# Altium PCB pcb.pcbdoc
Units mil, origin at the board's own origin, x right, y up, seen from the top; angles counter-clockwise.
Board outline 3200.6 x 1160 mil, 2 copper layers (Top Layer, Bottom Layer), stack 62.2 mil thick; 10 components, 11 nets, 46 pads, 24 vias.
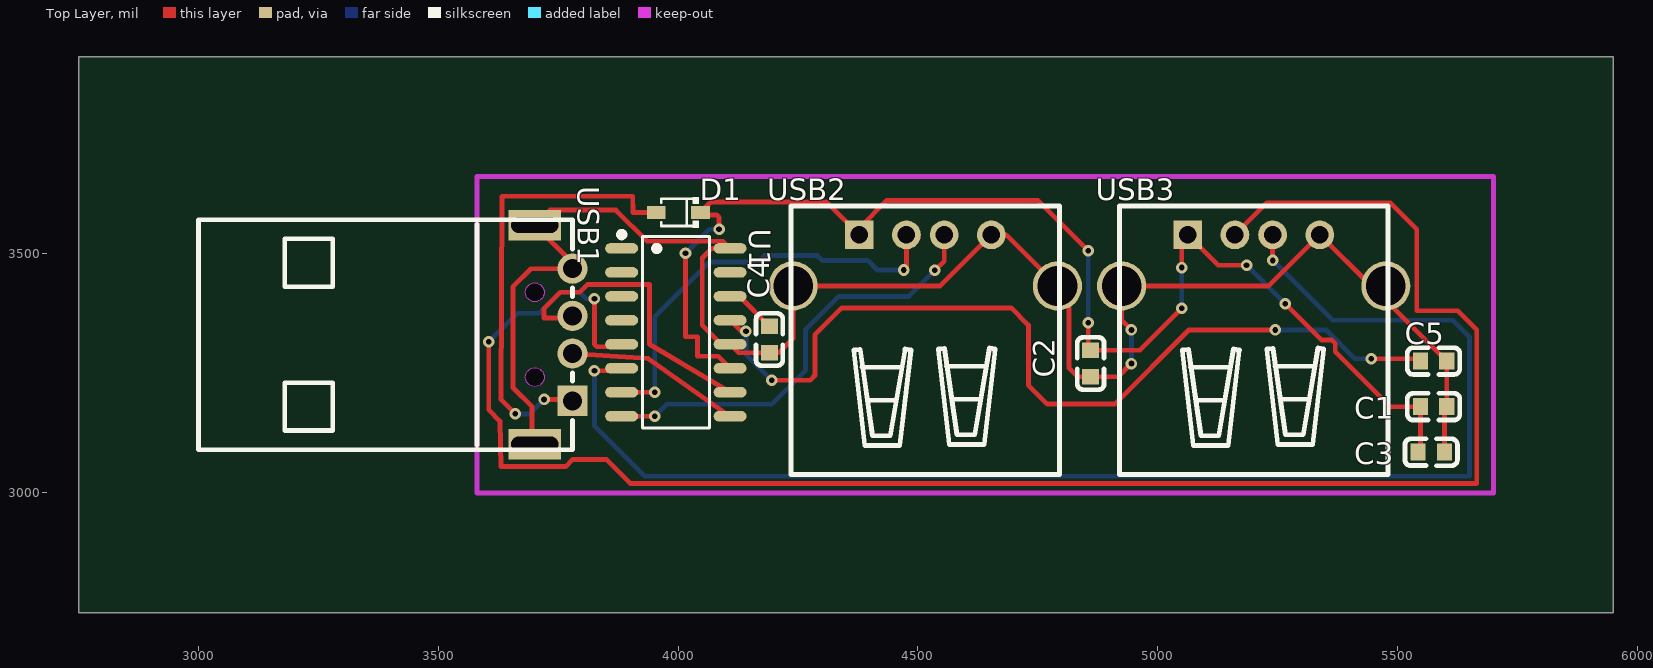
[diagram p0: Top Layer view]
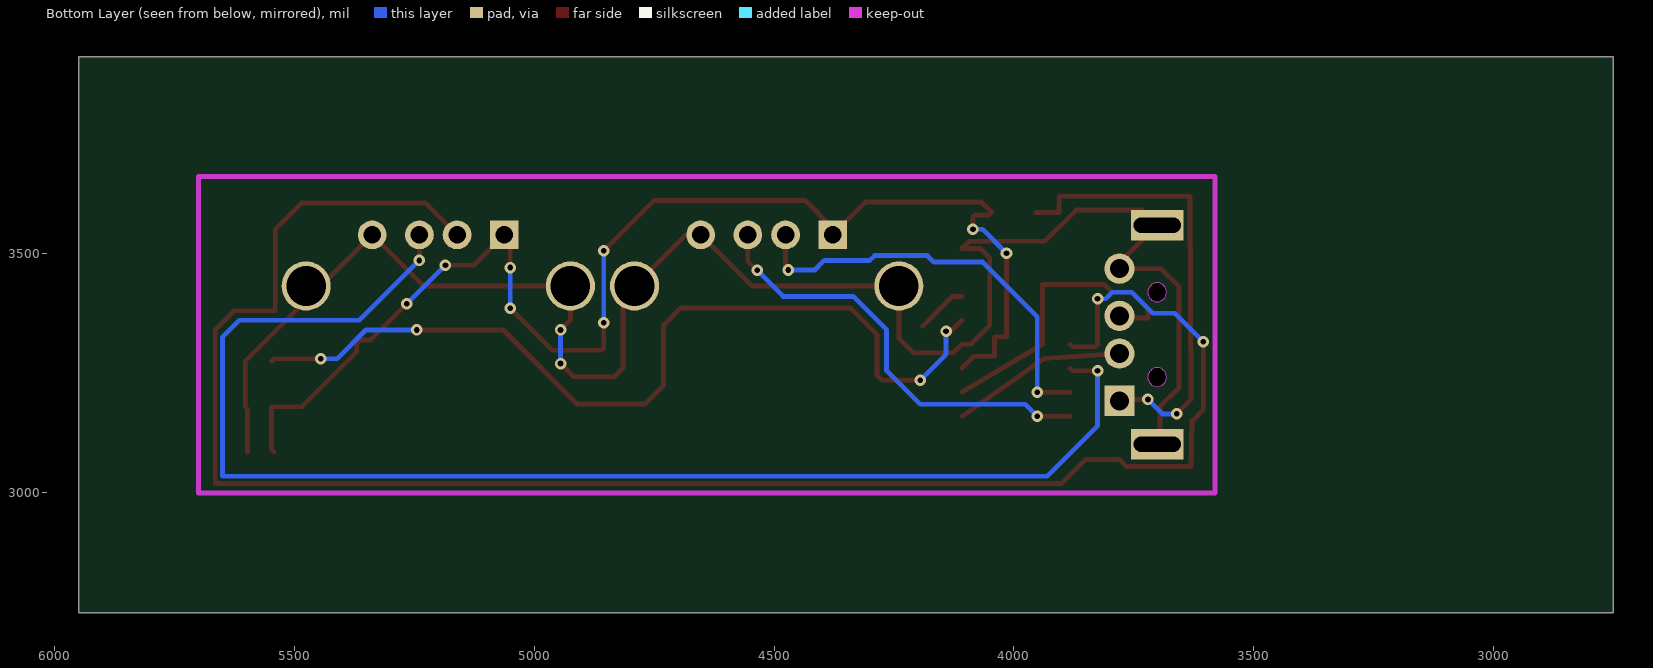
[diagram p1: Bottom Layer view, seen from below]

## Layer stack, top to bottom
Top Solder Mask Layer: solder mask 0.4, Dk 3.3
Top Layer: signal copper 1.4
Dielectric1: surface 59.4, FR4, Dk 4.5
Bottom Layer: signal copper 1.4
Bottom Solder Mask Layer: solder mask 0.4, Dk 3.3

## Board outline
5950.6,2750 2750,2750 2750,3910 5950.6,3910

## Design rules (kind name [scope] priority, off if disabled: settings)
BoardOutlineClearance copperThickness1oz [All] p0: genericclearance=10 ignorepadtopadclearanceinfootprint=FALSE except(0: Arc-SplitContinuation Track-SplitContinuation SMDPad-SplitContinuation THPad-SplitContinuation Via-SplitContinuation Fill-SplitContinuation Poly-SplitContinuation Region-SplitContinuation Text-SplitContinuation)
BoardOutlineClearance copperThickness2oz [All] p0: genericclearance=10 ignorepadtopadclearanceinfootprint=FALSE except(0: Arc-SplitContinuation Track-SplitContinuation SMDPad-SplitContinuation THPad-SplitContinuation Via-SplitContinuation Fill-SplitContinuation Poly-SplitContinuation Region-SplitContinuation Text-SplitContinuation)
BoardOutlineClearance otherClearance [All] p0: genericclearance=10 ignorepadtopadclearanceinfootprint=FALSE except(0: Arc-SplitContinuation Track-SplitContinuation SMDPad-SplitContinuation THPad-SplitContinuation Via-SplitContinuation Fill-SplitContinuation Poly-SplitContinuation Region-SplitContinuation Text-SplitContinuation)
Clearance copperThickness1oz [All] p1: gap=7 ignorepadtopadclearanceinfootprint=FALSE
Clearance copperThickness2oz [All] p1: gap=7 ignorepadtopadclearanceinfootprint=FALSE
Clearance otherClearance [All] p1: gap=7 ignorepadtopadclearanceinfootprint=FALSE
DiffPairsRouting differentialPair [All] p1: maxuncoupledlength=10 minlimit=6 maxlimit=Infinity mostfreqgap=6 toplayer_minwidth=5 toplayer_prefwidth=10 toplayer_maxwidth=100 bottomlayer_minwidth=5 bottomlayer_prefwidth=10 bottomlayer_maxwidth=100
PasteMaskExpansion pasteMaskExpansion [All] p1: expansion=0
PlaneConnect innerPlane [All] p1: planeconnectstyle=Relief reliefexpansion=20 reliefentries=4 reliefconductorwidth=10 reliefairgap=10
PolygonConnect copperRegion [All] p1: connectstyle=Relief reliefentries=4 reliefconductorwidth=10 polygonreliefangle="90 Angle" airgapwidth=10
RoutingVias viaSize [All] p1: viastyle="Through Hole" holewidth=12.0078 minholewidth=11.811 maxholewidth=248.0314 width=12.0078 minwidth=11.811 maxwidth=248.0314
SolderMaskExpansion solderMaskExpansion [IsVia] p1: useseparateexpansions=TRUE expansion=-1000 expansionbottom=-1000
SolderMaskExpansion solderMaskExpansion [All] p2: useseparateexpansions=TRUE expansion=2 expansionbottom=2
Width copperThickness1oz [All] p1: maxlimit=100 minlimit=5 preferedwidth=10
Width copperThickness2oz [All] p1: maxlimit=100 minlimit=8 preferedwidth=10

## Components (designator, comment, footprint, x,y, rotation, side; value= is the part's Value field where it differs from the comment)
C1 "10uF" C0603#1 5575.6,3180 r0 top
C2 "10uF" C0603#2 4860.6,3270 r90 top
C3 "10uF" C0603#3 5570.6,3085 r180 top
C4 "10uF" C0603#2 4190.6,3320 r270 top
C5 "10uF" C0603#1 5575.6,3275 r0 top
D1 "NSR0320MW2T1G" SOD-323_L1.8-W1.3-LS2.5-RD 4000.6,3585 r180 top
U1 "SL2.1A" SOP-16_L10.0-W3.9-P1.27-LS6.0-BL 3995.6,3335 r270 top
USB1 "U-G-O4DD-W-1" USB-A-TH_U-G-04WD-W-01 3740.6,3330 r270 top
USB2 "903-131A1011D10100" USB-A-TH_C46407 4515.6,3485 r0 top
USB3 "903-131A1011D10100" USB-A-TH_C46407 5200.6,3485 r0 top

## Footprints (in the part's own frame and the unit in brackets; to place one, negate y for a bottom-side part, rotate by r counter-clockwise, add the part's x,y. Pads: shape width x height; smd on the part's side, far side on the other; paste and mask are expansions set on the pad)
C0603#1 [mil]
  rect 31.5x35.4 smd: 1(-27.5,0) 2(27.6,0)
  silkscreen extent -55,-28 55,28
C0603#2 [mil]
  rect 31.5x35.4 smd: 1(-27.6,0) 2(27.6,0)
  silkscreen extent -55,-28 55,28
C0603#3 [mil]
  rect 31.5x35.4 smd: 1(-27.6,0) 2(27.5,0)
  silkscreen extent -55,-28 55,28
SOD-323_L1.8-W1.3-LS2.5-RD [mil]
  rect 39.4x27.6 smd: 1(-46.2,0) 2(46.1,0)
  silkscreen extent -43,-32 36,32
SOP-16_L10.0-W3.9-P1.27-LS6.0-BL [mil]
  oval 22x68.7 smd: 1(-175,-113.1) 2(-125,-113.1) 3(-75,-113.1) 4(-25,-113.1) 5(25,-113.1) 6(75,-113.1) 7(125,-113.1) 8(175,-113.1) 9(175,113.1) 10(125,113.1) 11(75,113.1) 12(25,113.1) 13(-25,113.1) 14(-75,113.1) 15(-125,113.1) 16(-175,113.1)
  silkscreen extent -210,-119 200,70
USB-A-TH_C46407 [mil]
  rect 60x60 hole 36.2: 1(-137.8,53.3)
  round 60 hole 36.2: 2(-39.3,53.3) 3(39.4,53.3) 4(137.8,53.3)
  round 102.4 hole 82.7: 5(275.6,-53.3) 6(-275.6,-53.3)
  silkscreen extent -280,-447 280,113
USB-A-TH_U-G-04WD-W-01 [mil]
  rect 63x63 hole 39.4: 1(137.8,39.4)
  round 63 hole 39.4: 2(39.4,39.4) 3(-39.4,39.4) 4(-137.8,39.4)
  rect 63x110.2 hole 31.5 slot 98.4 at 90 deg: 5(228.3,-39.3) 6(-228.3,-39.3)
  Board Outline Layer lines w0.1: 88.6,-59 92.4,-58.6 96.1,-57.5 99.5,-55.7 102.5,-53.3 105,-50.3 106.8,-46.9 107.9,-43.2 108.3,-39.3 107.9,-35.5 106.8,-31.8 105,-28.4 102.5,-25.4 99.5,-23 96.1,-21.2 92.4,-20 88.6,-19.7 84.7,-20 81.1,-21.2 77.6,-23 74.7,-25.4 72.2,-28.4 70.4,-31.8 69.3,-35.5 68.9,-39.3 69.3,-43.2 70.4,-46.9 72.2,-50.3 74.7,-53.3 77.6,-55.7 81.1,-57.5 84.7,-58.6 88.6,-59 ; -88.6,-59 -84.7,-58.6 -81.1,-57.5 -77.6,-55.7 -74.7,-53.3 -72.2,-50.3 -70.4,-46.9 -69.3,-43.2 -68.9,-39.3 -69.3,-35.5 -70.4,-31.8 -72.2,-28.4 -74.7,-25.4 -77.6,-23 -81.1,-21.2 -84.7,-20 -88.6,-19.7 -92.4,-20 -96.1,-21.2 -99.5,-23 -102.5,-25.4 -105,-28.4 -106.8,-31.8 -107.9,-35.5 -108.3,-39.3 -107.9,-43.2 -106.8,-46.9 -105,-50.3 -102.5,-53.3 -99.5,-55.7 -96.1,-57.5 -92.4,-58.6 -88.6,-59
  Board Outline Layer lines w10: 250,-160 -250,-160
  Board Outline Layer region: 108.3,-39.3 107.9,-43.2 106.8,-46.9 105,-50.3 102.5,-53.3 99.5,-55.7 96.1,-57.5 92.4,-58.6 88.6,-59 84.7,-58.6 81.1,-57.5 77.6,-55.7 74.7,-53.3 72.2,-50.3 70.4,-46.9 69.3,-43.2 68.9,-39.3 69.3,-35.5 70.4,-31.8 72.2,-28.4 74.7,-25.4 77.6,-23 81.1,-21.2 84.7,-20 88.6,-19.7 92.4,-20 96.1,-21.2 99.5,-23 102.5,-25.4 105,-28.4 106.8,-31.8 107.9,-35.5
  Board Outline Layer region: 108.3,-39.3 107.9,-43.2 106.8,-46.9 105,-50.3 102.5,-53.3 99.5,-55.7 96.1,-57.5 92.4,-58.6 88.6,-59 84.7,-58.6 81.1,-57.5 77.6,-55.7 74.7,-53.3 72.2,-50.3 70.4,-46.9 69.3,-43.2 68.9,-39.3 69.3,-35.5 70.4,-31.8 72.2,-28.4 74.7,-25.4 77.6,-23 81.1,-21.2 84.7,-20 88.6,-19.7 92.4,-20 96.1,-21.2 99.5,-23 102.5,-25.4 105,-28.4 106.8,-31.8 107.9,-35.5
  Board Outline Layer region: -68.9,-39.3 -69.3,-43.2 -70.4,-46.9 -72.2,-50.3 -74.7,-53.3 -77.6,-55.7 -81.1,-57.5 -84.7,-58.6 -88.6,-59 -92.4,-58.6 -96.1,-57.5 -99.5,-55.7 -102.5,-53.3 -105,-50.3 -106.8,-46.9 -107.9,-43.2 -108.3,-39.3 -107.9,-35.5 -106.8,-31.8 -105,-28.4 -102.5,-25.4 -99.5,-23 -96.1,-21.2 -92.4,-20 -88.6,-19.7 -84.7,-20 -81.1,-21.2 -77.6,-23 -74.7,-25.4 -72.2,-28.4 -70.4,-31.8 -69.3,-35.5
  Board Outline Layer region: -68.9,-39.3 -69.3,-43.2 -70.4,-46.9 -72.2,-50.3 -74.7,-53.3 -77.6,-55.7 -81.1,-57.5 -84.7,-58.6 -88.6,-59 -92.4,-58.6 -96.1,-57.5 -99.5,-55.7 -102.5,-53.3 -105,-50.3 -106.8,-46.9 -107.9,-43.2 -108.3,-39.3 -107.9,-35.5 -106.8,-31.8 -105,-28.4 -102.5,-25.4 -99.5,-23 -96.1,-21.2 -92.4,-20 -88.6,-19.7 -84.7,-20 -81.1,-21.2 -77.6,-23 -74.7,-25.4 -72.2,-28.4 -70.4,-31.8 -69.3,-35.5
  Multi-Layer board cut-out: 108.3,-39.3 107.9,-43.2 106.8,-46.9 105,-50.3 102.5,-53.3 99.5,-55.7 96.1,-57.5 92.4,-58.6 88.6,-59 84.7,-58.6 81.1,-57.5 77.6,-55.7 74.7,-53.3 72.2,-50.3 70.4,-46.9 69.3,-43.2 68.9,-39.3 69.3,-35.5 70.4,-31.8 72.2,-28.4 74.7,-25.4 77.6,-23 81.1,-21.2 84.7,-20 88.6,-19.7 92.4,-20 96.1,-21.2 99.5,-23 102.5,-25.4 105,-28.4 106.8,-31.8 107.9,-35.5
  Multi-Layer board cut-out: -68.9,-39.3 -69.3,-43.2 -70.4,-46.9 -72.2,-50.3 -74.7,-53.3 -77.6,-55.7 -81.1,-57.5 -84.7,-58.6 -88.6,-59 -92.4,-58.6 -96.1,-57.5 -99.5,-55.7 -102.5,-53.3 -105,-50.3 -106.8,-46.9 -107.9,-43.2 -108.3,-39.3 -107.9,-35.5 -106.8,-31.8 -105,-28.4 -102.5,-25.4 -99.5,-23 -96.1,-21.2 -92.4,-20 -88.6,-19.7 -84.7,-20 -81.1,-21.2 -77.6,-23 -74.7,-25.4 -72.2,-28.4 -70.4,-31.8 -69.3,-35.5
  silkscreen extent -240,-741 240,39

## Via types
v1: diameter 24, hole 12, Top Layer to Bottom Layer, 24 vias

## Nets (pads, with @x,y where several pads share a name; then routed paths per layer and width w, separated by ;. In a path a pad name is that pad's centre, name@x,y a point inside that pad or via, vN(x,y) a via of type N, cw(c..) or ccw(c..) an arc to the next point about the centre after c; other vN are vias at no path point)
$1N31: D1.2 USB1.1 | length 954.4
  Top Layer w10: v1(3660.6,3165) 3630.6,3195 3633.2,3618.9 3905.8,3618.9 3905.9,3585 D1.2 ; v1(3720.6,3195) 3777.2,3195 USB1.1
  Bottom Layer w10: v1(3660.6,3165) 3690.6,3165 v1(3720.6,3195)
$1N35: C5.1 U1.13 | length 1880.3
  Top Layer w10: U1.13 4133.7,3335 v1(4141.5,3337.4) ; v1(4195.6,3235) 4275.6,3235 4285.6,3245 4285.6,3330 4341.6,3386 4694.7,3386 4730.6,3350 4730.6,3225 4770.2,3185.5 4911.1,3185.5 5065.6,3340 v1(5245.6,3340) ; v1(5445.6,3280) 5543.1,3280 C5.1
  Bottom Layer w10: v1(4141.5,3337.4) 4141.5,3289.2 v1(4195.6,3235) ; v1(5245.6,3340) 5351.3,3340 5411.3,3280 v1(5445.6,3280)
$1N36: C4.1 U1.14 | length 107.7
  Top Layer w10: U1.14 4128.2,3410 C4.1
+5V: C1.1 C2.2 C3.2 D1.1 U1.11 USB2.1 USB3.1 | length 2738.5
  Top Layer w10: v1(4015.6,3500) 4015.6,3326 4040.6,3325 4040.6,3285 4083.7,3285 U1.11 ; v1(4085.6,3550) 4085.6,3575 4080.6,3580 4051.8,3580 D1.1 4068.8,3607 4309.1,3607 USB2.1 4377.8,3552.2 4435.6,3610 4750.6,3610 v1(4855.6,3505) ; v1(4855.6,3355) 4855.6,3302.6 C2.2 4963.2,3297.6 v1(5050.6,3385) ; v1(5050.6,3470) 5050.6,3526.1 USB3.1 5126.2,3475 v1(5185.6,3475) ; v1(5266.1,3394.6) 5341.6,3319.1 5363.5,3319.1 5370.6,3311.9 5370.6,3295 5485.6,3180 C1.1 5548.1,3090 C3.2
  Bottom Layer w10: v1(4015.6,3500) 4065.6,3550 v1(4085.6,3550) ; v1(4855.6,3355) v1(4855.6,3505) ; v1(5050.6,3385) v1(5050.6,3470) ; v1(5185.6,3475) v1(5266.1,3394.6)
GND: C1.2 C2.1 C3.1 C4.2 C5.2 U1.12 U1.16 USB1.4 USB1.5 USB1.6 USB2.4 USB2.5 USB2.6 USB3.4 USB3.5 USB3.6 | length 3786.6
  Top Layer w10: USB1.5 3695.6,3107.3 3695.6,3180 3655.6,3220 3655.6,3430 3693.4,3467.8 USB1.4 3780,3479.6 USB1.6 3732.9,3590 3870.6,3590 3935.6,3525 4093.7,3525 U1.16 4070.6,3510 4050.6,3490 4050.6,3350 4090.6,3310 U1.12 4126.3,3292.4 C4.2 4210.2,3292.4 4240,3322.3 USB2.6 4546.7,3431.7 USB2.4 4684.5,3538.3 USB2.5 4815.6,3407.2 4815.6,3260 4833.2,3242.4 C2.1 4918.1,3242.4 v1(4945.6,3270) ; v1(4945.6,3340) 4925,3360.6 USB3.6 5231.7,3431.7 USB3.4 5445.1,3431.7 USB3.5 5476.2,3402 C5.2 C1.2 5598.2,3175 C3.1
  Bottom Layer w10: v1(4945.6,3270) v1(4945.6,3340)
USB1_DM: U1.7 USB2.2 | length 886.6
  Top Layer w10: U1.7 v1(3951.4,3210) ; v1(4470.6,3465) 4476.3,3470.6 USB2.2
  Bottom Layer w10: v1(3951.4,3210) 3951.4,3367.6 4065.4,3481.6 4167.2,3481.6 4180.6,3495 4290.6,3495 4300.6,3485 4395.6,3485 4415.6,3465 v1(4470.6,3465)
USB1_DP: U1.8 USB2.3 | length 911.7
  Top Layer w10: U1.8 v1(3951.4,3160) ; v1(4535.6,3464.3) 4555,3483.6 USB2.3
  Bottom Layer w10: v1(3951.4,3160) 3976.4,3185 4195.6,3185 4265.6,3255 4265.6,3340 4335.6,3410 4481.4,3410 v1(4535.6,3464.3) v1@4535.6,3465
USB2_DM: U1.5 USB3.2 | length 3818
  Top Layer w10: v1(3605.3,3315.4) 3605.3,3173.4 3628.6,3150 3630.6,3055 3765.6,3055 3780.6,3070 3850.6,3070 3900.6,3020 5665.6,3020 5665.6,3340 5625.6,3380 5540.6,3380 5540.6,3550 5485.6,3605 5227.9,3605 USB3.2 ; v1(3825.6,3405) 3825.6,3310 3830.6,3305 3877.5,3305 U1.5
  Bottom Layer w10: v1(3605.3,3315.4) 3664.9,3375 3710.6,3375 3754.2,3418.6 3794.9,3418.6 3808.5,3405 v1(3825.6,3405)
USB2_DP: U1.6 USB3.3 | length 2862.6
  Top Layer w10: v1(3825.6,3255) 3877.5,3255 U1.6 ; v1(5240,3485) USB3.3
  Bottom Layer w10: v1(3825.6,3255) 3825.6,3140 3930.6,3035 5650.6,3035 5650.6,3325 5615.6,3360 5365,3360 v1(5240,3485)
USB_DM: U1.9 USB1.2 | length 367.2
  Top Layer w10: USB1.2 3937.8,3280.4 U1.9
USB_DP: U1.10 USB1.3 | length 642.4
  Top Layer w10: USB1.3 3775.6,3365 3720.6,3365 3720.6,3385 3754.2,3418.6 3794.9,3418.6 3811.3,3435 3940.6,3435 3940.6,3310.2 U1.10
pads on no net: U1.1 U1.2 U1.3 U1.4 U1.15

## Keep-outs
Board Outline Layer:
  lines w10: 3580.6,3080 3580.6,3000 5700.6,3000 5700.6,3660 3580.6,3660 3580.6,3580